# Altium PCB CW308T_ADUCM3029_PANEL.PcbDoc
Units mil, origin at the board's own origin, x right, y up, seen from the top; angles counter-clockwise.
Board outline 4498.74 x 5463.74 mil, 2 copper layers (Top Layer, Bottom Layer); 6 components, 0 nets, 10 pads, 0 vias.
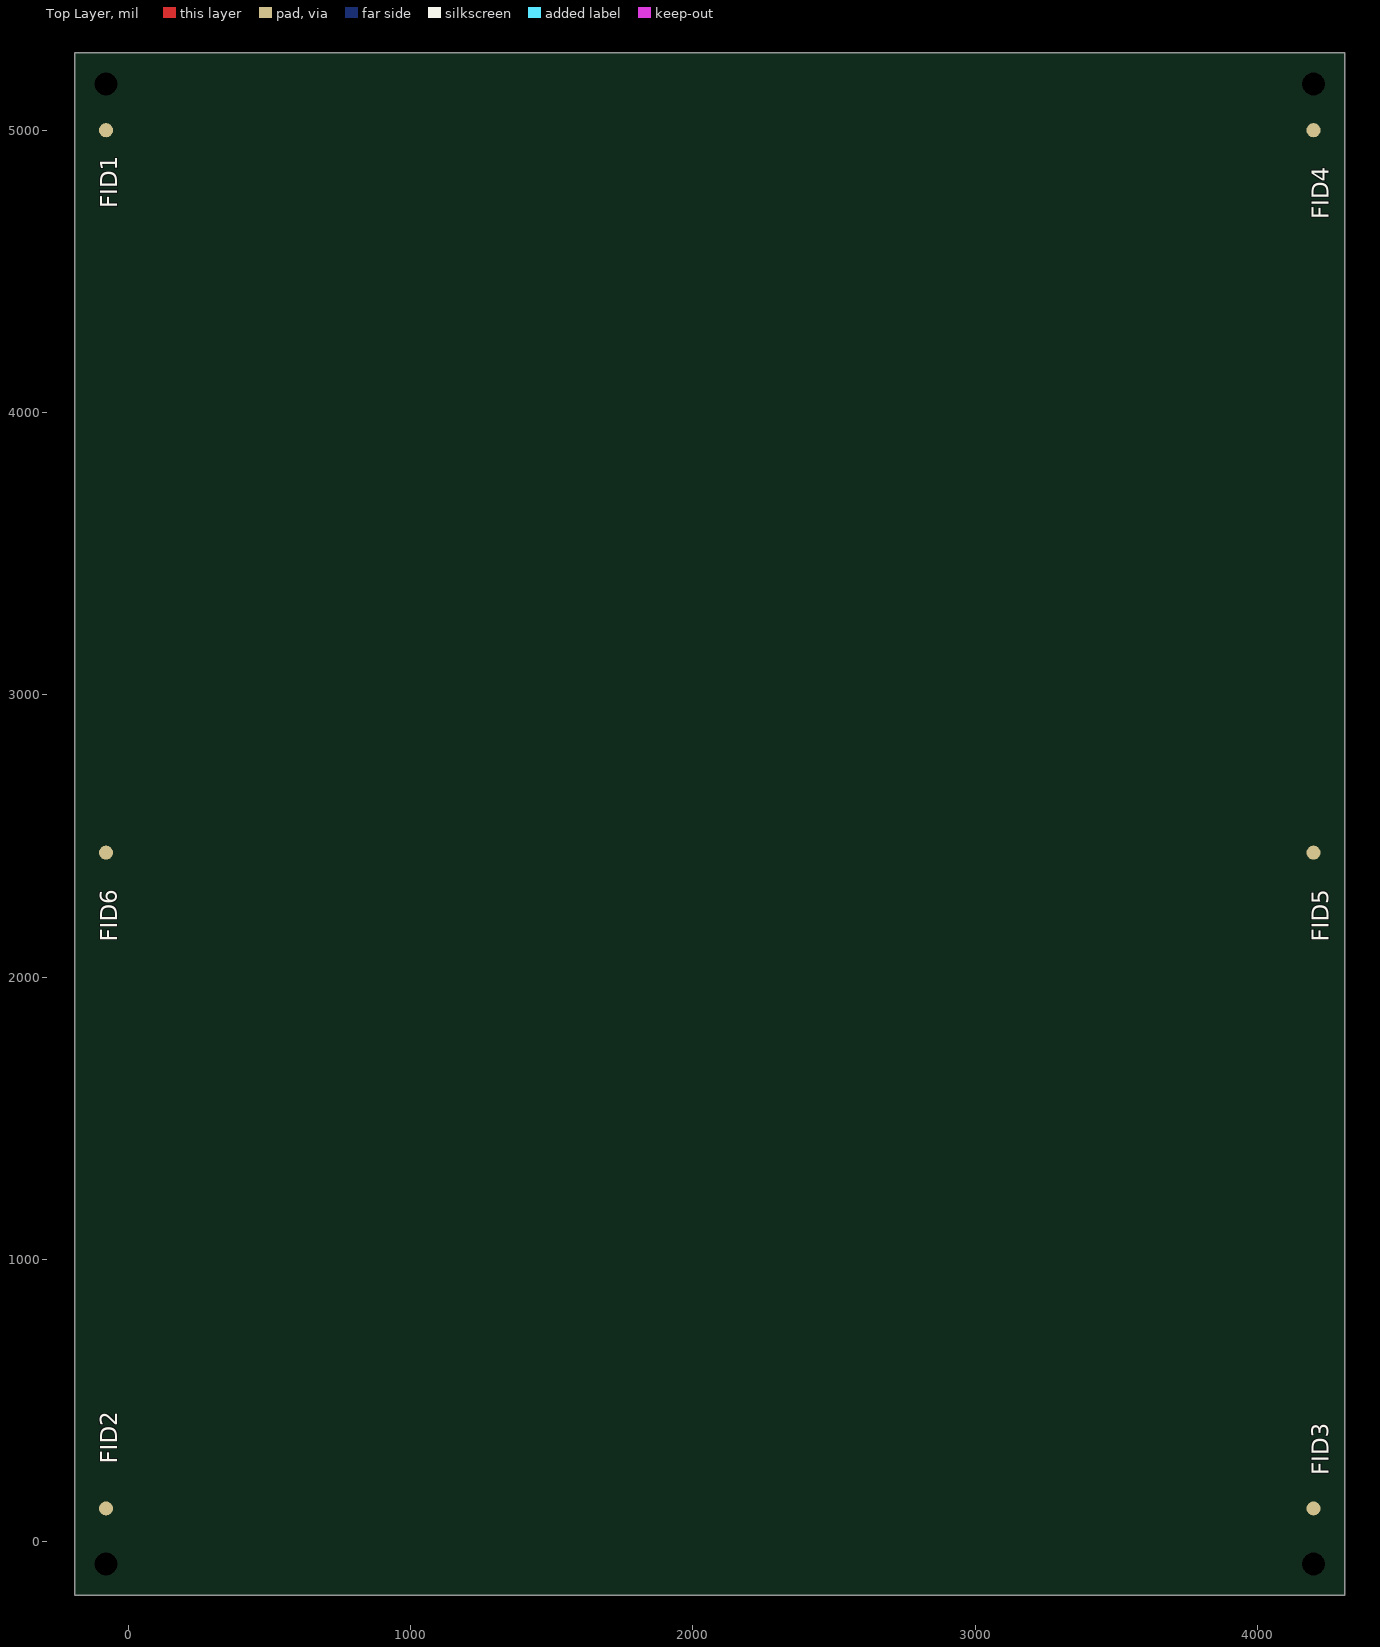
[diagram p0: Top Layer view]
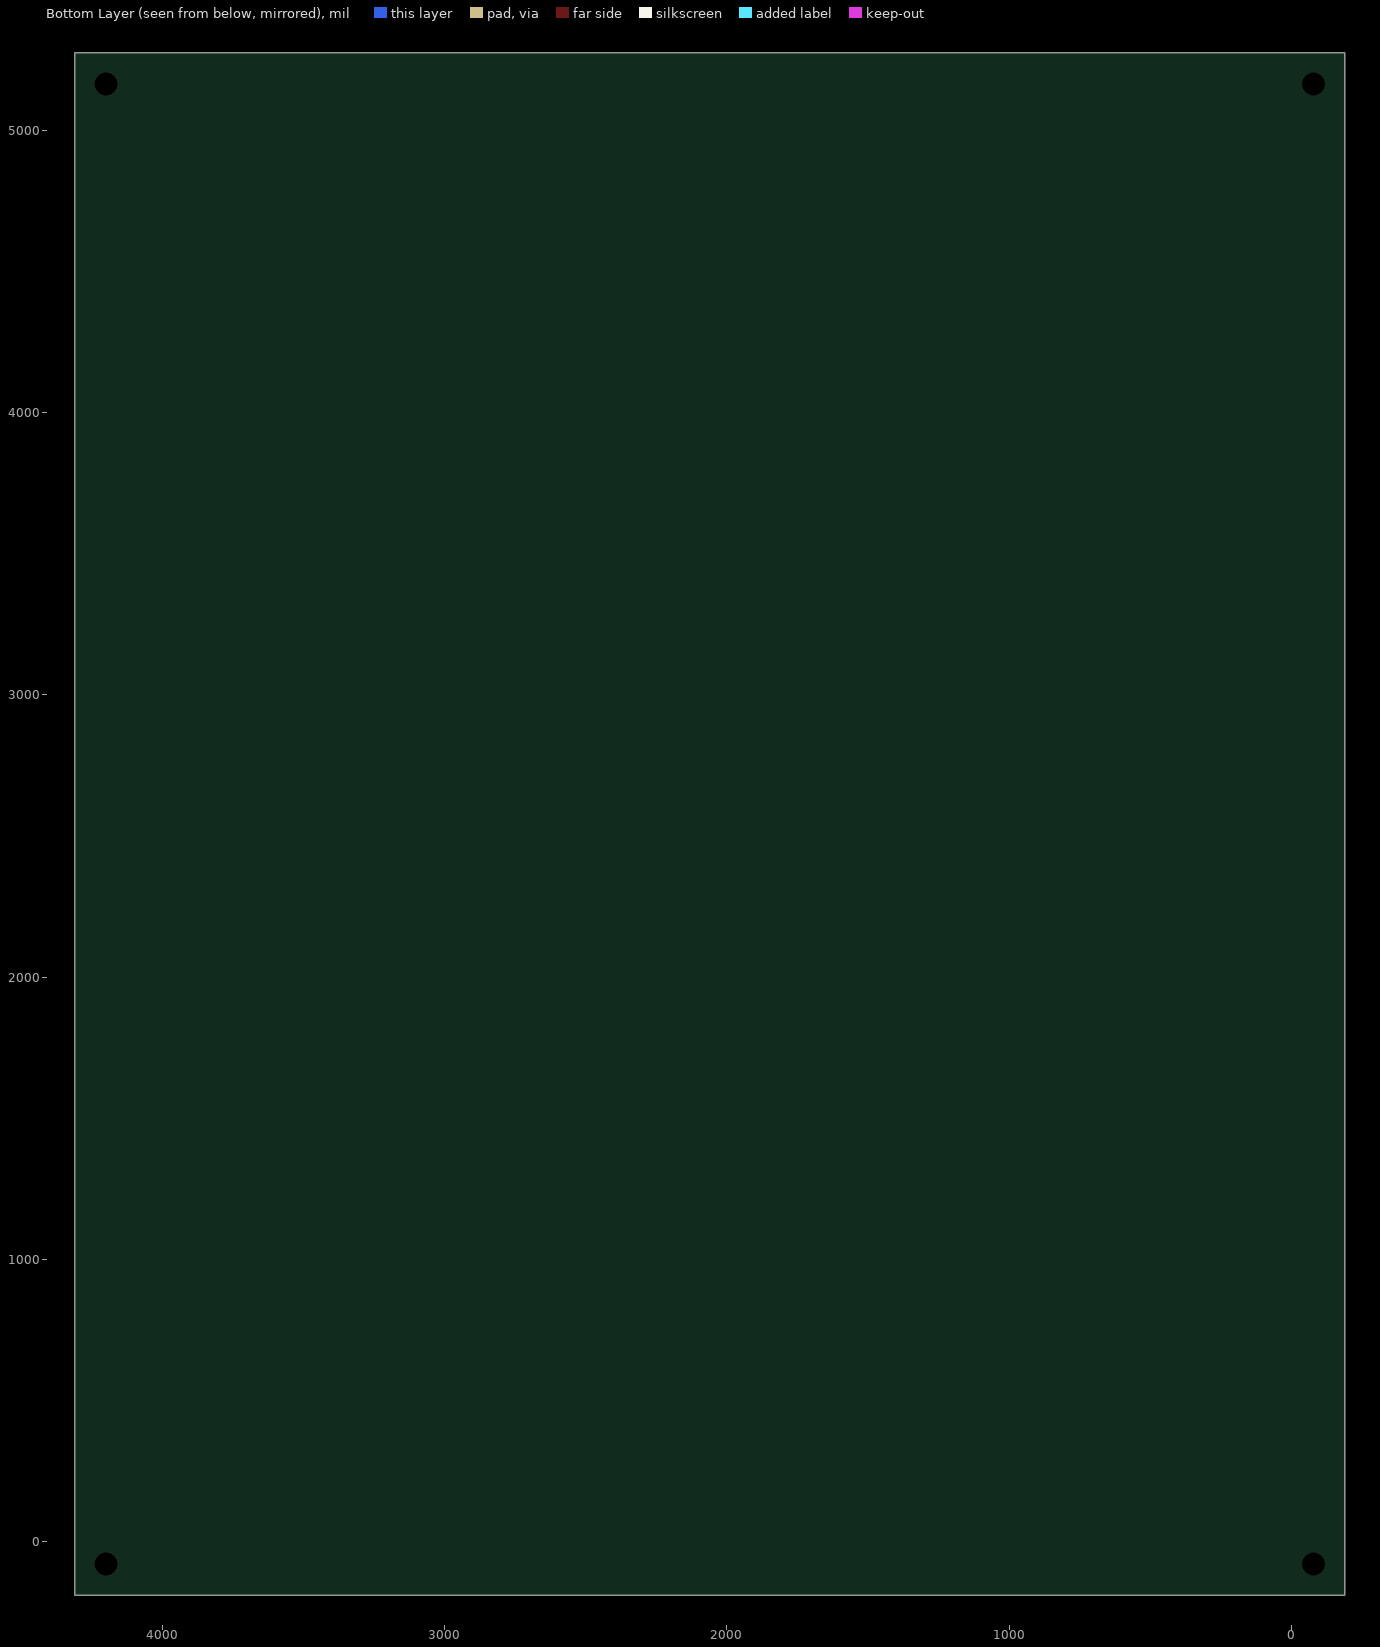
[diagram p1: Bottom Layer view, seen from below]

## Layer stack, top to bottom
Top Solder: solder mask 0.4, Solder Resist, Dk 3.5
Top Layer: signal copper 1.4
Dielectric 1: dielectric 12.6, FR-4, Dk 4.8
Bottom Layer: signal copper 1.4
Bottom Solder: solder mask 0.4, Solder Resist, Dk 3.5

## Board outline
-189.37,-189.37 4309.37,-189.37 4309.37,5274.37 -189.37,5274.37

## Design rules (kind name [scope] priority, off if disabled: settings)
Clearance [All] p1: gap=10 ignorepadtopadclearanceinfootprint=FALSE except(0: Arc-Hole Track-Hole SMDPad-Hole THPad-Hole Via-Hole Fill-Hole Poly-Hole Region-Hole Text-Hole)
PolygonConnect [All] p1: connectstyle=Relief reliefconductorwidth=10 reliefentries=4 polygonreliefangle="90 Angle" airgapwidth=10
RoutingVias [All] p1: holewidth=28 width=50 viastyle="Through Hole" minholewidth=28 minwidth=50 maxholewidth=28 maxwidth=50
SolderMaskExpansion [All] p1: expansion=4
Width [All] p1: maxlimit=10 minlimit=10 preferedwidth=10
30 further rules are at their usual default settings.

## Components (designator, comment, footprint, x,y, rotation, side; value= is the part's Value field where it differs from the comment)
FID1 "Comment" FIDU-ROUND-1.0mm#1 -78.74,5000 r0 top
FID2 "Comment" FIDU-ROUND-1.0mm#1 -78.74,118.11 r0 top
FID3 "Comment" FIDU-ROUND-1.0mm#2 4212.6,118.11 r0 top
FID4 "Comment" FIDU-ROUND-1.0mm#2 4212.6,5000 r0 top
FID5 "Comment" FIDU-ROUND-1.0mm#2 4212.6,2440.94 r0 top
FID6 "Comment" FIDU-ROUND-1.0mm#1 -78.74,2440.94 r0 top

## Footprints (in the part's own frame and the unit in brackets; to place one, negate y for a bottom-side part, rotate by r counter-clockwise, add the part's x,y. Pads: shape width x height; smd on the part's side, far side on the other; paste and mask are expansions set on the pad)
FIDU-ROUND-1.0mm#1 [mil]
  round 50 smd paste-78.74 mask+27.56: M1(0,0)
FIDU-ROUND-1.0mm#2 [mil]
  round 50 smd paste-78.74 mask+27.56: M1(-13.86,0)

## Part data
FID1 FID2 FID3 FID4 FID5 FID6: library part FIDU-ROUND-1.0MM

## Free pads (board coordinates)
  round 0 hole 80.71: B_MH5(-78.74,5163.74) B_MH7(-78.74,-78.74) B_MH7(4198.74,-78.74) B_MH7(4198.74,5163.74)

## Nets (pads, with @x,y where several pads share a name; then routed paths per layer and width w, separated by ;. In a path a pad name is that pad's centre, name@x,y a point inside that pad or via, vN(x,y) a via of type N, cw(c..) or ccw(c..) an arc to the next point about the centre after c; other vN are vias at no path point)
pads on no net: FID1.M1 FID2.M1 FID3.M1 FID4.M1 FID5.M1 FID6.M1

## Silkscreen, mask and mechanical layers (free items; w line width, h text height)
VSCORE:
  lines w11.81: -189.37,0 4309.37,0 ; -189.37,2540 4309.37,2540 ; -189.37,5080 4309.37,5080 ; 0,-189.37 0,5274.37 ; 2060,-189.37 2060,5274.37 ; 4120,-189.37 4120,5274.37
Panel Outer Layer:
  the board outline again, w11.81

## Panel: embedded boards
"CW308T_ADUCM3029.PcbDoc" at 2,0, 2 rows x 2 columns, spacing 2545 x 2060, rotation 0